# EAGLE board ESP Updater (EAGLE 9.6.2)
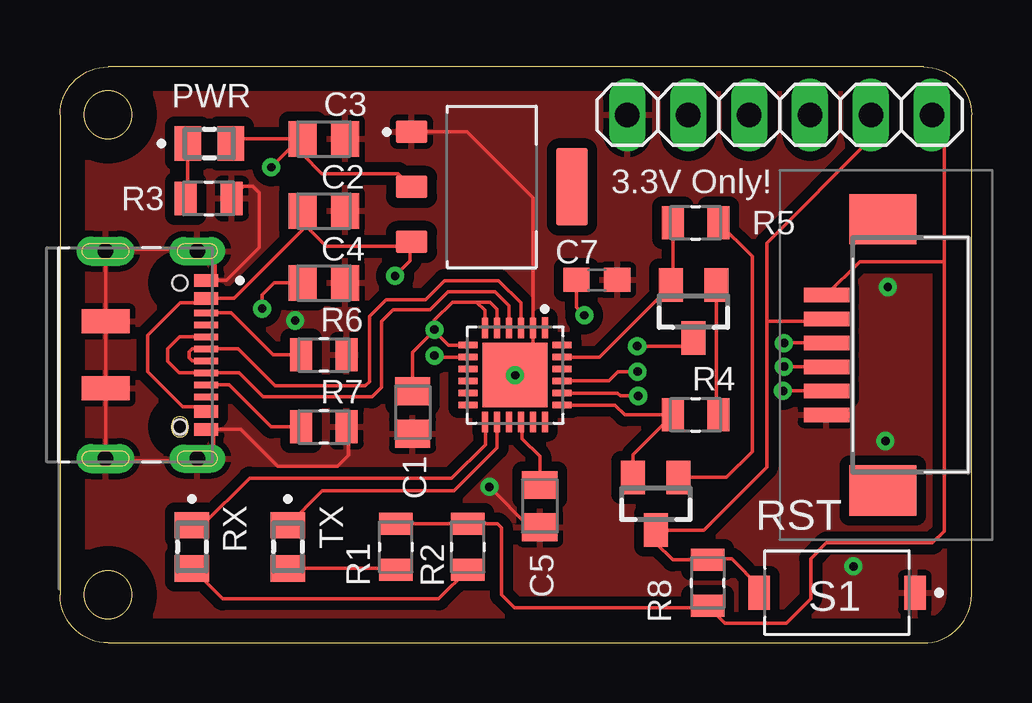
[diagram p0: board, top side]
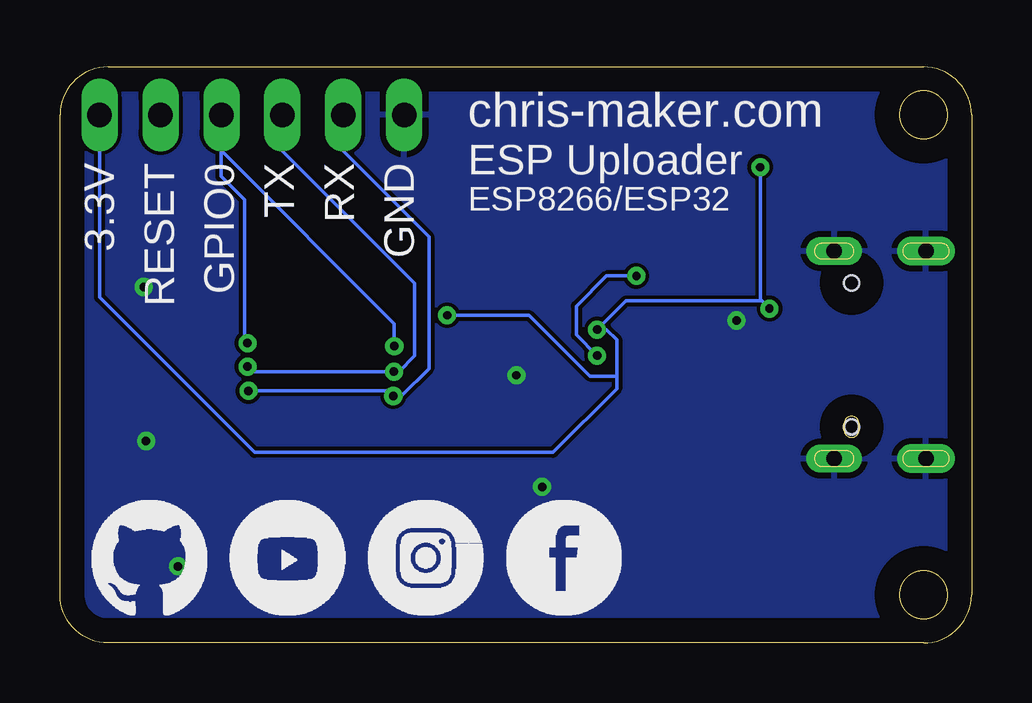
[diagram p1: board, bottom side, seen from below]

Size 38 x 24 mm. Coordinates in mm from the lower left corner, seen from the top.
Outline: 2,0 36,0 arc90 38,2 38,22 arc90 36,24 2,24 arc90 0,22 0,2 arc90 2,0
Outline: circle at 2,22 radius 1
Outline: circle at 2,2 radius 1
Copper layers (1*16): Top 0.035mm / dielectric 1.5mm / Bottom 0.035mm
Design rules "default": minimum track width 6mil, minimum drill 0.35mm, track to track 6mil, track to pad 6mil, pad to pad 6mil, via to via 6mil, smd to smd 6mil, copper to edge 40mil, drill to drill 6mil, minimum pad ring 10mil, minimum via ring 8mil, stop-mask expansion 4mil, vias tented up to drill 0mil, thermal gap 10mil

## Footprints (pad centres in the part's own frame; a part is rotated, then mirrored left to right if it is on the bottom)
CAPC2012X94N = smd 1.16 x 1.47: 1 -0.88,0; 2 0.88,0
C0603 = smd 1.1 x 1: 1 -0.85,0; 2 0.85,0
JAE_DX07S016JA1R1500 = smd 0.52 x 1: 1 -3.1,1.1; 2 -2.35,1.1; 11 2.35,1.1; 12 3.1,1.1 | smd 0.27 x 1: 3 -1.75,1.1; 4 -1.25,1.1; 5 -0.75,1.1; 6 -0.25,1.1; 7 0.25,1.1; 8 0.75,1.1; 9 1.25,1.1; 10 1.75,1.1 | smd 1 x 2: S1 -1.4,-3.1; S2 1.4,-3.1 | drill 0.65 long: S3 -4.32,0.725; S4 4.32,0.725 | drill 0.65 pad 1.2 long: S5 -4.32,-3.1; S6 4.32,-3.1 | hole 0.6: 3,0 | hole 0.63: 3,0; -3,0
528520670 = smd 0.6 x 1.9: 1 -2.5,2.475; 2 -1.5,2.475; 3 -0.5,2.475; 4 0.5,2.475; 5 1.5,2.475; 6 2.5,2.475 | smd 2.1 x 2.8: 7 -5.65,0.125; 8 5.65,0.125
1X06 = drill 1.016 long: 1 -6.35,0; 2 -3.81,0; 3 -1.27,0; 4 1.27,0; 5 3.81,0; 6 6.35,0
LEDC2012X120N = smd 1.1 x 1.45: A 0.9,0; C -0.9,0
SOT23-BEC = smd 1 x 1.4: B -0.95,-1.1; C 0,1.1; E 0.95,-1.1
RESC2012X60N = smd 0.92 x 1.38: 1 -0.955,0; 2 0.955,0
SW_PTS636_SM43J_SMTR_LFS = smd 0.9 x 1.4: 1 -3.25,0; 2 3.25,0
QFN50P400X400X80-25N = smd 0.84 x 0.26: 1 -1.97,1.25 | smd 0.82 x 0.26: 2 -1.955,0.75; 3 -1.955,0.25; 4 -1.955,-0.25; 5 -1.955,-0.75; 6 -1.955,-1.25; 13 1.955,-1.25; 14 1.955,-0.75; 15 1.955,-0.25; 16 1.955,0.25; 17 1.955,0.75; 18 1.955,1.25 | smd 0.26 x 0.82: 7 -1.25,-1.955; 8 -0.75,-1.955; 9 -0.25,-1.955; 10 0.25,-1.955; 11 0.75,-1.955; 12 1.25,-1.955; 19 1.25,1.955; 20 0.75,1.955; 21 0.25,1.955; 22 -0.25,1.955; 23 -0.75,1.955; 24 -1.25,1.955 | smd 2.7 x 2.7: 25 0,0
SOT229P700X180-4N = smd 0.93 x 1.31: 1 -2.29,-3.345; 2 0,-3.345; 3 2.29,-3.345 | smd 3.24 x 1.31: 4 0,3.345

## Placement (x,y rotation side)
C1  1uF  [CAPC2012X94N]  14.7,9.6 90 top
C2  10uF  [CAPC2012X94N]  11,18 180 top
C3  1uF  [CAPC2012X94N]  11,21 180 top
C4  10uF  [CAPC2012X94N]  11,15 180 top
C5  4.7uF  [CAPC2012X94N]  20,5.7 90 top
C7  0.1uF  [C0603]  22.38,15.12 0 top
J1  DX07S016JA1R1500  [JAE_DX07S016JA1R1500]  5,12 270 top
J2  52852-0670  [528520670]  34.43,12 90 top
JP1  [1X06]  30,22 180 top
PWR  SML-LXT0805IW-TR  [LEDC2012X120N]  6.23,20.81 0 top
Q1  MMBT2222  [SOT23-BEC]  26.41,13.81 180 top
Q2  MMBT2222  [SOT23-BEC]  24.84,5.8 180 top
R1  1K  [RESC2012X60N]  14,4 270 top
R2  1K  [RESC2012X60N]  17,4 270 top
R3  1K  [RESC2012X60N]  6.2,18.52 0 top
R4  10k  [RESC2012X60N]  26.5,9.5 0 top
R5  10k  [RESC2012X60N]  26.5,17.5 0 top
R6  5.1k  [RESC2012X60N]  11,12 180 top
R7  5.1k  [RESC2012X60N]  11,9 180 top
R8  10K  [RESC2012X60N]  27,2.5 90 top
RX  SML-LXT0805IW-TR  [LEDC2012X120N]  5.5,4 270 top
S1  PTS636_SM43J_SMTR_LFS  [SW_PTS636_SM43J_SMTR_LFS]  32.39,2.09 180 top
TX  SML-LXT0805IW-TR  [LEDC2012X120N]  9.5,4 270 top
U1  CP2104  [QFN50P400X400X80-25N]  18.97,11.16 270 top
U2  AMS1117-3.3  [SOT229P700X180-4N]  18,19 270 top

## Library data of the parts
C1-C5 = 0805YC103J4T2A; AVAILABILITY: In Stock; DESCRIPTION: 10000 pF ±5% 16V Ceramic Capacitor X7R 0805 (2012 Metric); MF: AVX; MP: 0805YC103J4T2A; PACKAGE: 2012 AVX; PRICE: None; PURCHASE-URL: https://pricing.snapeda.com/search/part/0805YC103J4T2A/?ref=eda
C7 = rcl; SPICEPREFIX: C
J1 = DX07S016JA1R1500; AVAILABILITY: In Stock; DESCRIPTION: USB-C (USB TYPE-C) USB 2.0 Receptacle Connector 24 (16+8 Dummy) Position Surface Mount, Right Angle; Through Hole; MF: JAE Electronics; MP: DX07S016JA1R1500; PACKAGE: None; PRICE: None; PURCHASE-URL: https://pricing.snapeda.com/search/part/DX07S016JA1R1500/?ref=eda
J2 = 52852-0670; DESCRIPTION: FFC & FPC Connectors 1.0 FFC Non ZIF SMT HsgAssy6CktEmbsTpPkg; HEIGHT: 3mm; MANUFACTURER_NAME: Molex; MANUFACTURER_PART_NUMBER: 52852-0670; MOUSER_PART_NUMBER: 538-52852-0670; MOUSER_PRICE-STOCK: https://www.mouser.co.uk/ProductDetail/Molex/52852-0670?qs=%252BdbFUiYBkDZQc5IPgvIwgQ%3D%3D
JP1 = pinhead
PWR RX TX = SML-LXT0805IW-TR; AVAILABILITY: In Stock; DESCRIPTION: Red - LED Indication - Discrete 2V 0805 (2012 Metric); MF: Lumex Opto/Components; MP: SML-LXT0805IW-TR; PACKAGE: 0805 Lumex; PRICE: None; PURCHASE-URL: https://pricing.snapeda.com/search/part/SML-LXT0805IW-TR/?ref=eda
Q1 Q2 = MMBT2222_; AVAILABILITY: In Stock; DESCRIPTION: Bipolar (BJT) Transistor NPN 30 V 600 mA 250MHz 300 mW Surface Mount SOT-23-3 (TO-236); MF: ON Semiconductor; MP: MMBT2222; PACKAGE: SOT-23-3 Fairchild Semiconductor; PRICE: None; PURCHASE-URL: https://pricing.snapeda.com/search/part/MMBT2222/?ref=eda
R1-R8 = RC0805FR-07330RL; AVAILABILITY: In Stock; DESCRIPTION: 330 Ohms ±1% 0.125W, 1/8W Chip Resistor 0805 (2012 Metric) Moisture Resistant Thick Film; MF: Yageo; MP: RC0805FR-07330RL; PACKAGE: 2012 Rohm Semiconductor; PRICE: None; PURCHASE-URL: https://pricing.snapeda.com/search/part/RC0805FR-07330RL/?ref=eda
S1 = PTS636_SM43J_SMTR_LFS; AVAILABILITY: In Stock; DESCRIPTION: Tactile Switch SPST-NO Top Actuated Surface Mount; MF: C&K; MP: PTS636 SM43J SMTR LFS; PACKAGE: None; PRICE: None; PURCHASE-URL: https://pricing.snapeda.com/search/part/PTS636 SM43J SMTR LFS/?ref=eda
U1 = CP2104-F03-GM; AVAILABILITY: In Stock; DESCRIPTION: USB Bridge, USB to UART USB 2.0 UART Interface 24-QFN (4x4); MF: Silicon Labs; MP: CP2104-F03-GM; PACKAGE: WFQFN-24 Silicon Labs; PRICE: None; PURCHASE-URL: https://pricing.snapeda.com/search/part/CP2104-F03-GM/?ref=eda
U2 = AMS1117-3.3; AVAILABILITY: Not in stock; DESCRIPTION: LDO Voltage Regulators 800MA LDO LINEAR REG; MF: Advanced Monolithic Systems; MP: AMS1117-3.3; PACKAGE: SOT-223 Seeed Technology; PRICE: None

## Nets
3.3: C1.2 C3.2 C4.2 C7.1 J2.6 JP1.1 PWR.A R1.1 R2.1 R8.1 U1.5 U1.6 U1.7 U2.2
D+: J1.6 J1.7 U1.3
D-: J1.5 J1.8 U1.4
DTR: Q1.E R5.1 U1.23
GND: C1.1 C2.1 C3.1 C4.1 C5.1 C7.2 J1.1 J1.12 J1.S1 J1.S2 J1.S3 J1.S4 J1.S5 J1.S6 J2.1 JP1.6 R3.2 R6.1 R7.1 S1.1 U1.2 U1.25 U2.1
GPIO0: J2.4 JP1.3 Q1.C
N$1: J1.3 R6.2
N$2: J1.9 R7.2
N$3: PWR.C R3.1
N$4: R2.2 RX.A
N$5: R1.2 TX.A
N$6: Q2.B R5.2
N$7: Q1.B R4.2
N$8: C5.2 U1.16
RESET: J2.5 JP1.2 Q2.C R8.2 S1.2
RTS: Q2.E R4.1 U1.19
RXD: J2.2 JP1.5 U1.20
RXLED: RX.C U1.13
TXD: J2.3 JP1.4 U1.21
TXLED: TX.C U1.14
VCC: C2.2 J1.2 J1.11 U1.8 U2.3

## Tracks (layer width: path | path; a pad name or v marks a point on that pad's centre or on a via)
3.3  (via drill 0.35)
  Top 0.152: 10.13,20.98 C3.2 6.73,21 PWR.A | 10.13,20.98 10.13,20.33 10.91,19.55 14.1,19.55 U2.2 | v8.81,19.82 9.97,20.98 10.13,20.98 | v8.43,13.93 8.43,14.5 8.93,15 C4.2 | U1.6 17.72,13.85 17.37,14.2 | 15.6,13.01 15.6,13.05 | 15.6,13.05 15.6,13.44 16.36,14.2 17.37,14.2 | U1.7 17,12.39 16.2,12.39 15.6,13.01 | U1.5 18.22,13.91 17.93,14.2 17.37,14.2 | R1.1 R2.1 18.25,4.96 18.4,4.8 18.4,2 18.95,1.45 26.91,1.45 R8.1 27.72,0.82 30.28,0.82 31.3,1.84 31.3,3.51 31.95,4.17 36.37,4.17 36.86,4.66 36.86,15.88 | JP1.1 36.86,21.49 36.86,15.88 | J2.6 33.34,15.88 36.86,15.88 | 15.6,13.05 v15.61,13.05 | C1.2 14.7,12.11 15.6,13.01 | v21.86,13.65 21.53,13.98 C7.1
  Bottom 0.152: v8.81,19.82 8.81,14.31 v8.43,13.93 8.75,14.25 14.41,14.25 v15.61,13.05 15.21,13.05 14.79,12.63 14.79,11.11 | 14.79,11.11 14.79,10.59 17.44,7.94 29.89,7.94 36.35,14.4 JP1.1 | 14.79,11.11 15.91,11.11 18.45,13.65 v21.86,13.65
D+
  Top 0.152: U1.3 19.22,14.16 18.29,15.1 16.03,15.1 15.23,14.3 13.6,14.3 12.91,13.61 12.91,10.89 12.72,10.7 8.97,10.7 7.42,12.25 J1.6 5.5,12.25 5.38,12.12 5.38,11.88 5.5,11.75 J1.7
D-
  Top 0.152: U1.4 18.72,14.05 18.14,14.64 16.18,14.64 15.42,13.88 13.88,13.88 13.4,13.4 13.4,10.64 13.01,10.25 8.47,10.25 7.47,11.25 J1.8 4.97,11.25 4.48,11.74 4.48,12.25 4.98,12.75 J1.5
DTR
  Top 0.152: U1.23 22.49,11.91 25.46,14.88 Q1.E 25.55,14.99 R5.1
GND  (via drill 0.35)
  Top 0.152: U2.1 16.98,21.29 19.72,18.55 U1.2 19.72,11.91 U1.25 | R3.2 7.67,19.02 8.03,19.02 8.31,18.75 8.31,16.46 6.95,15.1 6.46,15.1 | R7.1 12.04,8.91 12.04,7.82 11.58,7.37 9.07,7.37 7.53,8.9 6.41,8.9 | J1.12 6.41,8.9 | 1.9,7.82 J1.S2 J1.S1 J1.S5 1.99,16.41 5.58,16.41 5.67,16.32 J1.S3 6.46,16.32 6.46,15.1 | 1.9,7.82 J1.S6 | 6.41,8.9 6.41,7.68 J1.S4 5.67,7.68 5.58,7.59 2.13,7.59 1.9,7.82 | J1.1 6.46,15.1 | v17.9,6.5 19.58,4.82 C5.1
  other vias: 18.97,11.15 34.41,8.41 34.51,14.83 33.08,3.19 9.8,13.43
  pour Top (isolate 0.406): -0.97,1.97 -0.97,21.87 arc-90 2.15,25 34.97,25 arc-90 38.97,21 38.97,1.97 arc-90 36,-1 2,-1 arc-90
  pour Bottom: -0.6,2 -0.6,21.87 arc-90 2.03,24.5 35.5,24.5 arc-90 38.48,21.52 38.48,1.98 arc-90 36,-0.5 1.9,-0.5 arc-90
GPIO0  (via drill 0.35)
  Top 0.152: v24.07,12.36 26.07,12.36 Q1.C | v30.18,12.49 v30.19,12.5 J2.4
  Bottom 0.152: v24.07,12.36 24.07,13.29 31.27,20.5 JP1.3 31.29,21.98 31.29,19.44 30.31,18.46 30.31,12.62 v30.18,12.49
N$1
  Top 0.152: R6.2 8.89,12 7.14,13.75 J1.3
N$2
  Top 0.152: J1.9 7.05,10.75 8.8,9 R7.2
N$3
  Top 0.152: PWR.C 5.33,18.6 R3.1
N$4
  Top 0.152: RX.A 6.77,1.83 15.78,1.83 R2.2
N$5
  Top 0.152: TX.A 14,3.1 R1.2
N$6
  Top 0.152: R5.2 28.85,16.1 28.85,7.96 27.79,6.9 Q2.B
N$7
  Top 0.152: Q1.B 27.36,9.59 R4.2
N$8
  Top 0.152: U1.16 19.26,9.16 19.26,8.51 20,7.77 C5.2
RESET
  Top 0.152: JP1.2 33.81,21 29.47,16.66 29.47,13.4 | S1.2 29.14,2.36 28,3.5 27.05,3.5 R8.2 25.55,3.46 24.84,4.16 Q2.C 26.85,4.7 29.47,7.31 29.47,13.4 | J2.5 31.86,13.4 29.47,13.4
RTS
  Top 0.152: Q2.E 23.89,7.84 R4.1 23.55,9.5 23.14,9.91 U1.19
RXD  (via drill 0.35)
  Top 0.152: U1.20 23.25,10.41 23.37,10.29 v24.11,10.29 | v30.14,10.5 J2.2
  Bottom 0.152: JP1.5 26.19,20.5 22.62,16.93 22.62,11.43 23.77,10.29 v24.11,10.29 24.32,10.5 v30.14,10.5
RXLED
  Top 0.152: U1.13 17.73,9.2 17.73,8.26 16.33,6.87 7.9,6.87 5.93,4.9 RX.C
TXD  (via drill 0.35)
  Top 0.152: U1.21 20.94,10.92 22.89,10.92 23.27,11.3 v24.08,11.3 | v30.18,11.51 J2.3
  Bottom 0.152: JP1.4 28.73,20.5 23.21,14.98 23.21,11.96 23.87,11.3 v24.08,11.3 29.97,11.3 v30.18,11.51
TXLED
  Top 0.152: U1.14 18.22,8.12 16.43,6.33 10.93,6.33 TX.C
VCC  (via drill 0.35)
  Top 0.152: 14.6,16.66 14.47,16.53 11.09,16.53 10.19,17.43 10.19,17.93 C2.2 10.12,17.22 7.25,14.35 J1.2 5.92,14.17 5.01,14.17 3.66,12.82 3.66,11.29 5.12,9.84 5.92,9.84 J1.11 | U1.8 15.67,11.91 v15.61,11.97 | v13.97,15.29 14.6,15.92 14.6,16.66 | U2.3 14.6,16.66
  Bottom 0.152: v13.97,15.29 15.21,15.29 16.47,14.04 16.47,12.83 v15.61,11.97

## Text on the board
tPlace: 3.3V Only!
bPlace: chris-maker.com | ESP Uploader | GND | RX | TX | GPIO0 | RESET | 3.3V | ESP8266/ESP32
tNames: RST